# Altium PCB ECTU_PCB.PcbDoc (part 2 of 3)
Units mm, origin at the board's own origin, x right, y up, seen from the top; angles counter-clockwise.
Board outline 155 x 102 mm, 4 copper layers (Top Layer, Mid Top, Mid Bottom, Bottom Layer), stack 0.603 mm thick; 266 components, 187 nets, 917 pads, 241 vias.
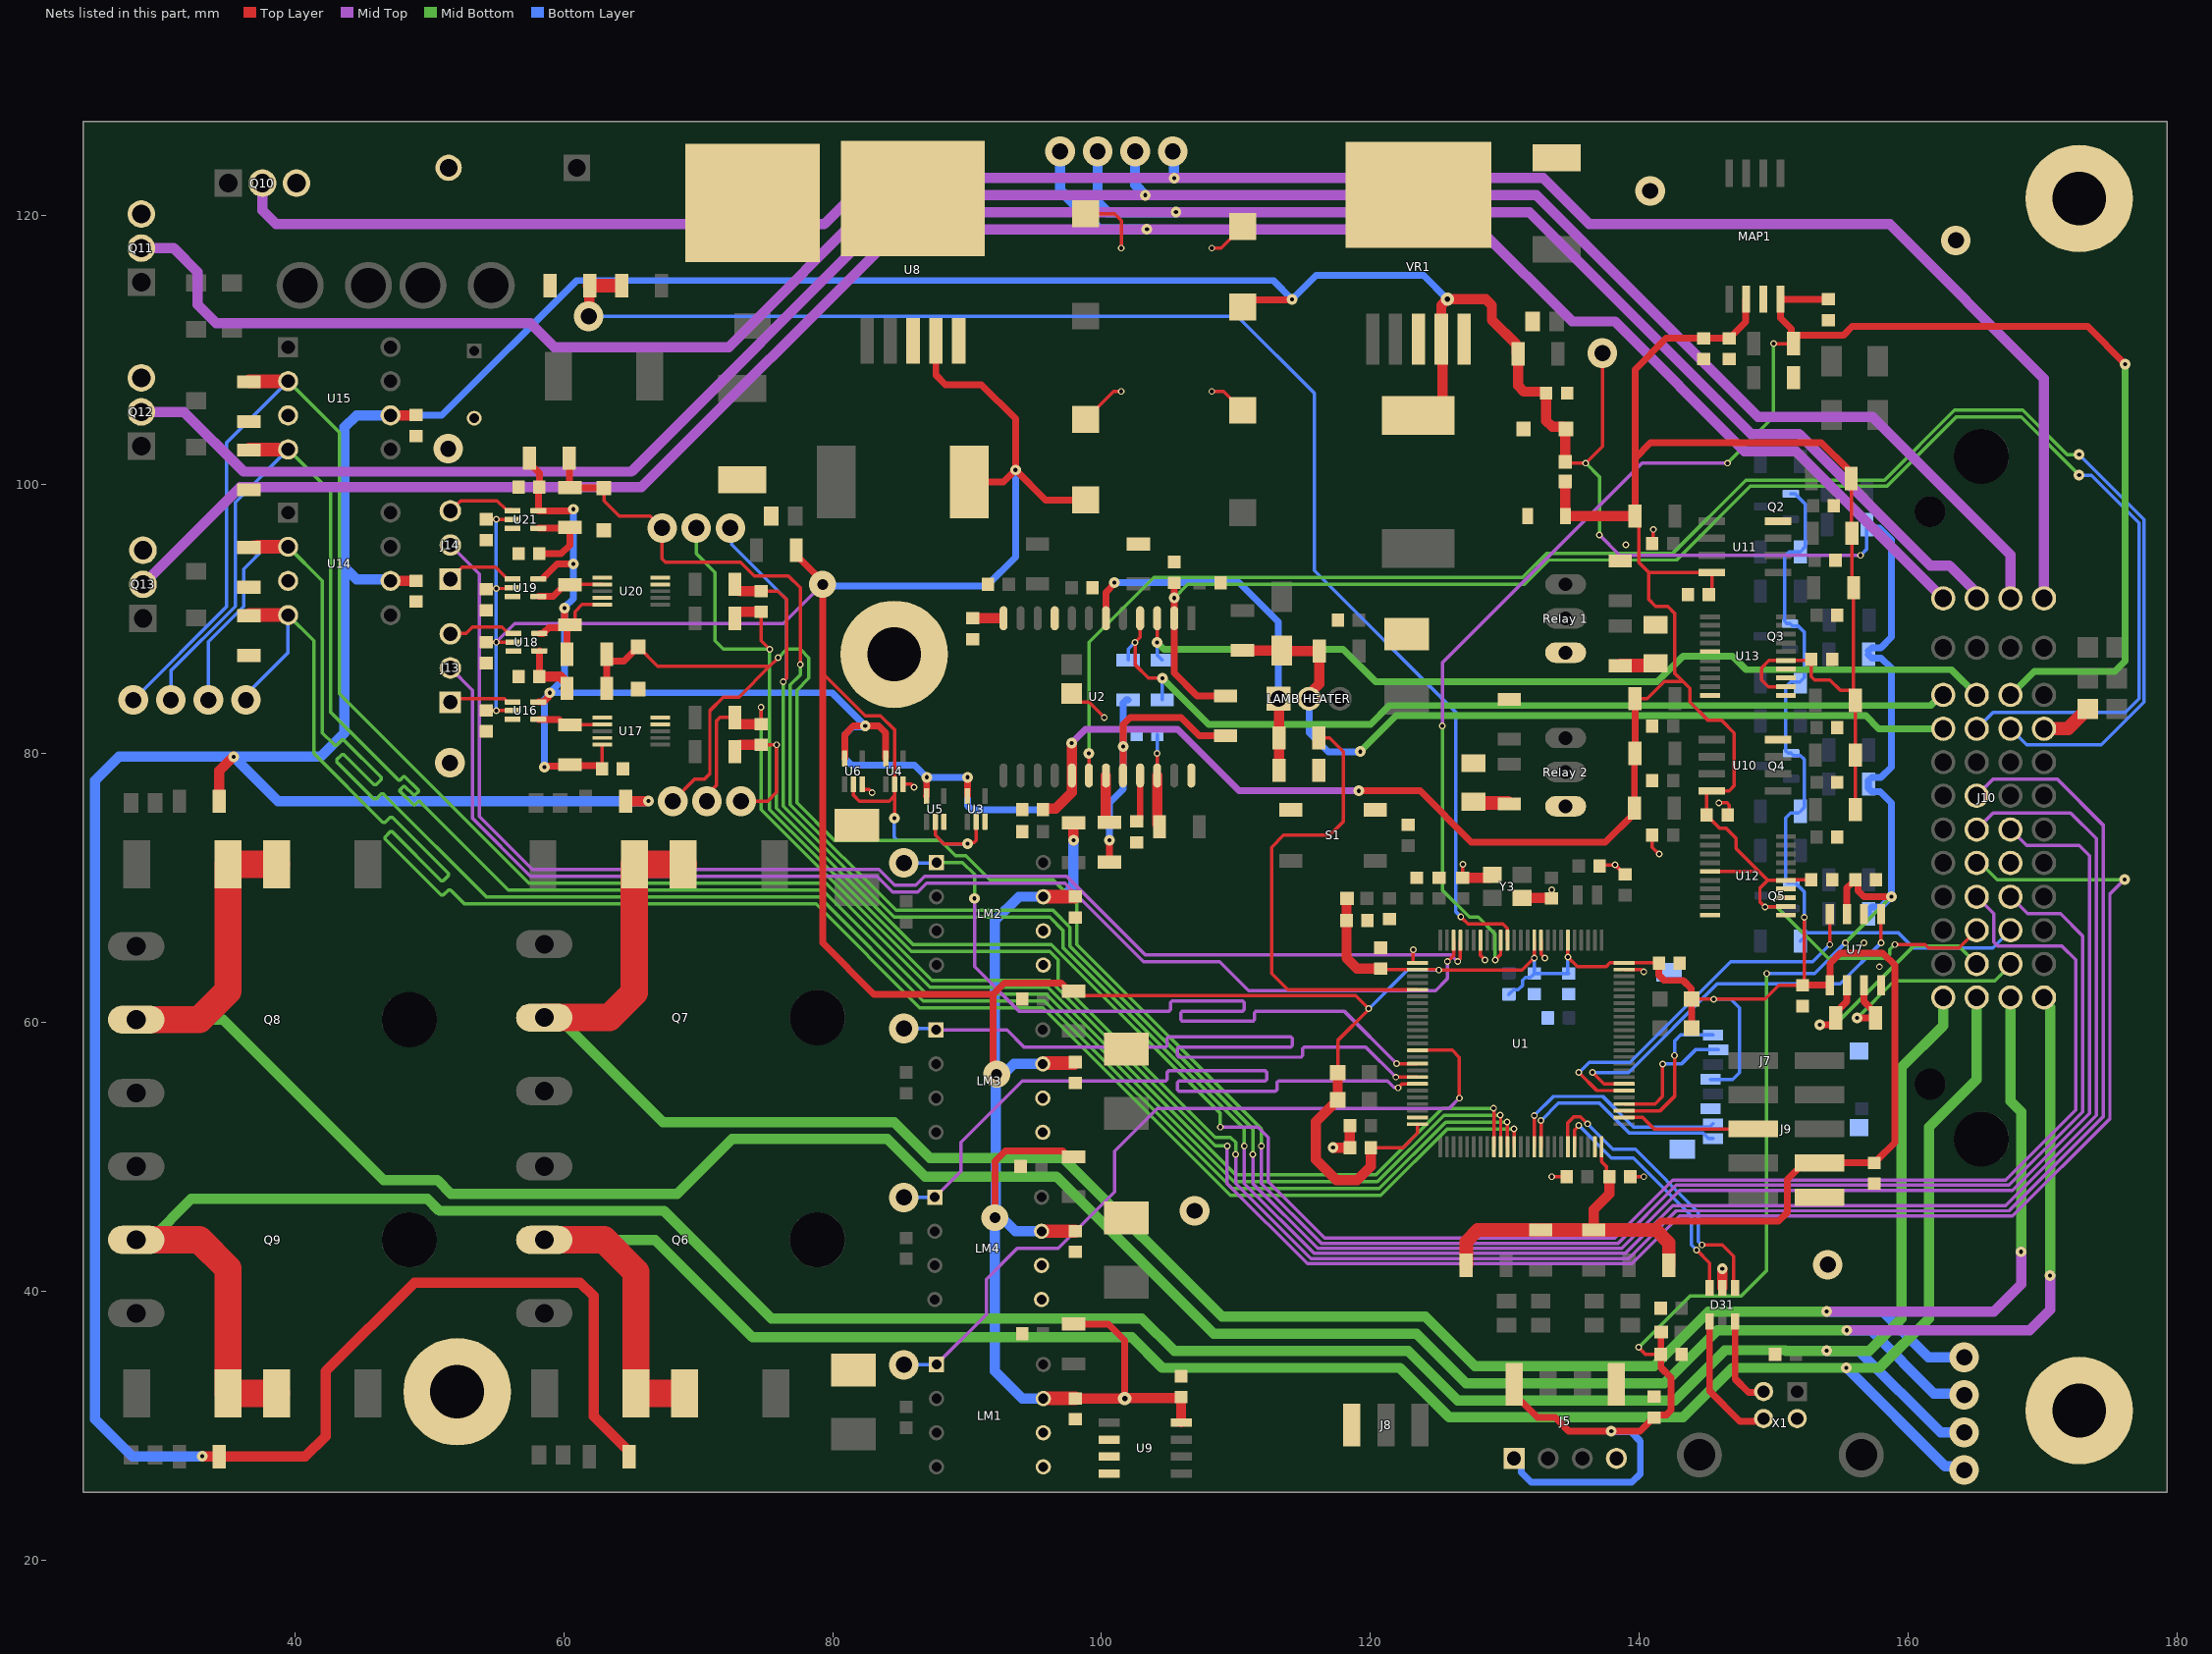
[diagram p4: the nets of this part, all layers, seen from the top]

## Via types
v1: diameter 0.5, hole 0.3, Top Layer to Bottom Layer, 142 vias
v2: diameter 0.8, hole 0.3, Top Layer to Bottom Layer, 59 vias
v3: diameter 2.2, hole 1.2, Top Layer to Bottom Layer, 31 vias
v4: diameter 2, hole 0.8, Top Layer to Bottom Layer, 6 vias
v5: diameter 1, hole 0.4, Top Layer to Bottom Layer, 3 vias

## Nets (pads, with @x,y where several pads share a name; then routed paths per layer and width w, separated by ;. In a path a pad name is that pad's centre, name@x,y a point inside that pad or via, vN(x,y) a via of type N, cw(c..) or ccw(c..) an arc to the next point about the centre after c; other vN are vias at no path point)
3.3V: C3.1 C4.1 C5.1 C6.1 C7.1 C8.1 C9.1 C33.1 C36.2 C37.2 C38.2 C40.2 C41.1 C58.2 C59.2 C64.2 C70.2 C81.2 C82.2 FL.1 J7.4 J9.03 J10.C3 L2.2 LM1.7 LM2.7 LM3.7 LM4.7 Q2.1 Q3.1 Q4.1 Q5.1 R10.1 R14.1 R16.2 R17.1 R18.2 R19.1 R20.1 R21.1 R22.1 R23.1 R27.2 R31.2 R35.2 R39.2 R56.1 R57.1 R62.1 R63.1 U1.6 U1.11 U1.27 U1.50 U1.75 U1.100 U3.2 U4.2 U5.2 U6.2 U7.5 U8.4 U9.8 U16.2 U18.2 U19.2 U21.2 | length 523.6
  Top Layer w0.254: C81.2@54.229,83.198 54.242,83.185 v1(54.969,83.185) U16.2@56.19,83.185 ; C37.2@54.229,88.278 54.231,88.28 v1(54.969,88.28) U18.2@56.261,88.28 ; C36.2@54.235,97.415 v1(54.969,97.415) U21.2@56.183,97.415 ; C70.2@54.289,92.275 v1(54.969,92.275) U19.2@56.136,92.275 ; 79.248,85.979 82.423,82.804 83.566,82.804 84.597,81.773 U4.2@84.597,77.709 84.597,76.85 ; U6.2@81.549,77.709 81.534,77.694 81.534,76.9 81.98,76.454 84.201,76.454 84.597,76.85 ; v2(84.582,75.184) 84.597,75.199 84.597,76.85 ; U5.2@87.63,74.915 87.63,73.914 88.265,73.279 v2(90.043,73.279) 90.147,73.383 90.523,73.383 90.678,73.538 U3.2@90.678,74.915 ; R57.1@97.917,62.313 98.254,61.976 118.908,61.976 v1(119.878,61.006) ; v5@101.72,32.011 v5(101.727,32.004) ; R19.1@117.57,56.261 117.57,58.642 v1@119.888,60.96 ; C7.1@120.028,50.673 122.428,50.673 123.511,51.756 U1.50@123.511,52.42 ; C5.1@120.828,63.92 U1.27@123.487,63.92 ; U1.27@123.511,63.92 125.044,63.92 125.083,63.881 v1(125.095,63.881) 131.286,63.881 v1(132.191,64.786) U1.11@132.191,66.1 ; U1.6@134.691,66.1 v1(134.691,64.841) 135.397,64.135 137.541,64.135 137.826,64.42 U1.100@138.871,64.42 141.434,64.42 C4.1@141.465,64.389 ; U1.75@137.191,50.74 137.191,49.626 137.576,49.241 137.576,48.72 C3.1@137.782,48.514 ; R16.2@143.846,61.767 R16.2@143.891,61.722 v1(145.542,61.722) 149.352,61.722 150.381,62.751 C38.2@152.146,62.751 152.15,62.755 152.273,62.878 v1(152.273,67.818)
  Top Layer w0.508: C70.2@54.229,92.215 C70.2@54.289,92.275 ; C36.2@54.229,97.422 C36.2@54.235,97.415 ; R14.1@77.299,95.123 77.299,94.743 79.248,92.794 79.248,85.979 79.248,65.913 83.07,62.091 91.948,62.091 ; U8.4@87.679,110.685 87.679,108.155 88.392,107.442 91.059,107.442 93.599,104.902 v2(93.599,101.092) ; L2.2@90.167,100.203 92.71,100.203 v2(93.599,101.092) ; v4(92.075,45.466) 92.075,49.657 92.837,50.419 97.112,50.419 97.537,49.994 R56.1@97.917,49.994 ; v4(92.202,56.134) 91.948,56.388 91.948,62.091 ; LM4.7@95.537,44.45 LM4.7@95.544,44.457 ; LM3.7@95.631,56.896 LM3.7@95.701,56.966 ; LM1.7@95.664,32.004 LM1.7@95.671,32.011 ; LM2.7@95.664,69.342 LM2.7@95.671,69.348 ; R63.1@97.917,37.548 100.501,37.548 101.727,36.322 v5(101.727,32.004) ; R57.1@97.917,62.313 97.537,62.313 97.306,62.544 97.306,62.622 97.008,62.92 92.777,62.92 91.948,62.091 ; C59.2@97.974,56.966 C59.2@98.044,57.036 ; C64.2@98.038,32.011 C64.2@98.044,32.017 ; C58.2@98.037,44.457 C58.2@98.044,44.463 ; C82.2@98.038,69.348 C82.2@98.044,69.355 ; C33.1@98.806,98.854 95.837,98.854 v2(93.599,101.092) ; U9.8@105.918,30.239 U9.8@105.931,30.226 ; 140.937,44.544 141.588,45.195 150.351,45.195 151.003,45.847 151.003,48.322 152.211,49.53 J9.03@153.416,49.53 153.423,49.537 157.48,49.537 157.504,49.537 157.716,49.749 157.716,49.773 159.004,51.06 159.004,64.262 158.115,65.151 154.94,65.151 154.178,64.389 U7.5@154.178,62.755 C38.2@152.15,62.755 ; C4.1@141.465,64.389 141.465,63.513 141.859,63.119 143.256,63.119 143.846,62.529 R16.2@143.846,61.767 ; R17.1@143.891,59.563 R16.2@143.891,61.722
  Top Layer w0.762: v2(97.917,73.533) R62.1@97.917,74.842 ; C64.2@98.044,32.017 98.05,32.011 v5@101.72,32.011 ; v5(101.727,32.004) 101.773,32.05 105.85,32.05 C40.2@105.918,32.118 U9.8@105.918,30.239 ; R19.1@117.57,56.261 R18.2@117.57,54.229 115.951,52.61 115.951,49.784 117.475,48.26 118.999,48.26 120.028,49.289 C7.1@120.028,50.673 ; FL.1@118.224,69.175 C41.1@118.224,67.564 118.224,64.783 119.012,63.995 C5.1@120.777,63.995 ; C5.1@120.777,63.971 C5.1@120.828,63.92 ; R22.1@136.606,44.544 136.606,46.055 137.782,47.231 C3.1@137.782,48.514
  Top Layer w1.016: LM4.7@95.544,44.457 C58.2@98.037,44.457 ; LM1.7@95.671,32.011 C64.2@98.038,32.011 ; LM2.7@95.671,69.348 C82.2@98.038,69.348 ; LM3.7@95.701,56.966 C59.2@97.974,56.966 ; R20.1@127.125,41.921 127.125,43.686 127.983,44.544 R21.1@132.669,44.544 R22.1@136.606,44.544 140.937,44.544 141.257,44.544 142.196,43.605 R23.1@142.196,41.921
  Mid Top w0.254: v1(54.969,88.28) 56.351,89.662 76.327,89.662 v4(79.248,92.583)
  Bottom Layer w0.254: v1(54.969,83.185) v1(54.969,88.28) v1(54.969,92.275) v1(54.969,97.415) ; v2(84.582,75.184) 84.582,73.787 84.836,73.533 88.011,73.533 88.265,73.279 v2(90.043,73.279) ; v1(119.878,61.006) 122.754,63.881 v1(125.095,63.881) ; R10.1@130.302,62.075 130.645,62.418 130.998,62.418 131.318,62.738 131.318,63.119 131.533,63.334 131.901,63.334 C8.1@132.207,63.64 ; v1(132.191,64.786) 132.191,63.656 C8.1@132.207,63.64 ; v1(134.691,64.841) 134.691,63.696 C9.1@134.747,63.64 C8.1@132.207,63.64 ; J7.4@145.288,55.753 146.939,55.753 147.447,56.261 147.447,61.087 146.812,61.722 v1(145.542,61.722) ; Q2.1@151.265,99.322 151.58,99.322 152.333,98.569 152.333,95.354 R27.2@151.975,94.996 151.13,94.996 150.805,94.671 150.805,89.843 150.978,89.67 Q3.1@151.218,89.67 151.391,89.497 151.803,89.497 152.273,89.027 152.273,85.642 R31.2@151.975,85.344 151.95,85.319 151.258,85.319 150.888,84.95 150.888,80.191 151.061,80.018 Q4.1@151.301,80.018 151.474,79.845 151.996,79.845 152.275,79.565 152.275,75.992 R35.2@151.975,75.692 151.849,75.566 151.258,75.566 150.901,75.209 150.901,70.539 151.074,70.366 Q5.1@151.301,70.366 151.616,70.366 152.273,69.709 v1(152.273,67.818) R39.2@152.273,66.615 ; R39.2@151.975,66.04 152.273,66.338 R39.2@152.273,66.615 ; J10.C3@167.615,66.853 166.294,65.532 160.401,65.532 159.258,66.675 152.333,66.675 R39.2@152.273,66.615
  Bottom Layer w0.508: v4(79.248,92.583) 79.375,92.456 91.44,92.456 93.599,94.615 v2(93.599,101.092)
  Bottom Layer w0.762: LM4.7@95.537,44.45 93.599,44.45 92.82,45.229 92.312,45.229 v4(92.075,45.466) ; LM3.7@95.631,56.896 93.472,56.896 92.947,56.371 92.439,56.371 v4(92.202,56.134) ; LM1.7@95.664,32.004 94.107,32.004 92.075,34.036 v4(92.075,45.466) ; v2(97.917,73.533) 97.917,70.104 97.155,69.342 LM2.7@95.664,69.342 93.853,69.342 92.075,67.564 92.075,56.261 v4(92.202,56.134) ; v4(92.075,45.466) 92.138,45.529 92.138,56.07 v4(92.202,56.134)
5V: 5V.2 C21.2 C28.1 C29.2 C31.1 C39.2 C65.2 C66.2 D1.C FL1.1 FL2.2 J5.01 J5.02 L1.2 R15.1 R54.1 R55.1 R60.1 R61.1 U7.3 U14.6 U15.6 VR1.4 | length 480.2
  Top Layer w0.254: FL1.1@134.493,101.7 134.593,101.6 v1(136.017,101.6) 137.257,102.84 v3(137.257,109.788) ; v1(139.954,35.814) 140.462,35.306 C31.1@141.592,35.306
  Top Layer w0.508: U14.6@47.117,92.837 U14.6@47.123,92.843 ; U15.6@47.117,105.156 U15.6@47.124,105.163 ; C65.2@49.015,92.843 C65.2@49.022,92.85 ; C66.2@49.015,105.163 C66.2@49.022,105.169 ; C28.1@110.49,113.205 111.021,113.736 114.117,113.736 v2(114.173,113.792) ; J5.02@130.683,33.07 130.683,32.117 131.064,31.736 131.292,31.736 132.421,30.607 133.731,30.607 134.747,29.591 v2(137.922,29.591) 140.064,29.591 141.273,30.8 142.03,30.8 142.367,31.137 142.367,33.555 141.612,34.31 141.612,36.937 FL2.2@141.632,36.957 ; U7.3@155.448,68.055 155.448,69.99 C39.2@155.834,70.376 ; C39.2@156.07,70.612 156.276,70.406 156.276,69.784 156.718,69.342 v2(158.75,69.342)
  Top Layer w0.762: v2@33.147,27.686 R61.1@34.373,27.686 40.767,27.686 42.291,29.21 42.291,34.036 48.895,40.64 61.214,40.64 62.23,39.624 62.23,30.689 64.853,28.066 R54.1@64.853,27.686 ; R60.1@34.373,76.454 34.373,78.696 v2(35.433,79.756) ; U14.6@47.123,92.843 C65.2@49.015,92.843 ; U15.6@47.124,105.163 C66.2@49.015,105.163 ; R55.1@64.594,76.454 v2(66.294,76.454) ; L1.2@123.571,105.153 124.026,105.153 125.349,106.476 125.349,110.743 VR1.4@125.271,110.821 125.271,113.333 v5(125.73,113.792) 128.586,113.792 129.032,113.346 129.032,112.268 130.877,110.423 130.877,109.832 R15.1@130.981,109.728 ; R15.1@130.982,110.107 130.982,107.362 131.428,106.916 133.004,106.916 133.083,106.837 133.083,104.749 133.529,104.303 134.385,104.303 134.544,104.144 D1.C@134.544,104.14 ; FL1.1@134.493,101.7 D1.C@134.493,104.196
  Mid Top w0.254: v1(137.033,96.266) 138.557,94.742 v1(156.464,94.742)
  Mid Bottom w0.254: v1(136.017,101.6) 137.033,100.584 v1(137.033,96.266) ; v1(139.954,35.814) 143.764,39.624 147.574,39.624 149.479,41.529 v1(149.479,63.627) ; v1(155.321,65.913) v2(158.75,69.342)
  Bottom Layer w0.254: v1(149.479,63.627) 153.035,63.627 v1(155.321,65.913) ; v1(156.464,94.742) 156.928,95.206 5V.2@156.928,97.028
  Bottom Layer w0.508: U15.6@47.117,105.156 50.927,105.156 60.96,115.189 112.776,115.189 v2(114.173,113.792) 115.951,115.57 123.952,115.57 v5(125.73,113.792) ; J5.01@130.683,27.559 131.209,27.033 131.209,26.525 131.953,25.781 139.446,25.781 140.081,26.416 140.081,28.829 139.375,29.535 137.978,29.535 v2(137.922,29.591) ; 5V.2@157.055,68.072 157.055,68.334 157.286,68.565 157.973,68.565 v2(158.75,69.342) 158.75,76.327 157.91,77.167 157.286,77.167 157.055,77.398 157.055,77.986 157.286,78.217 157.973,78.217 158.75,78.994 158.75,86.36 158.004,87.106 157.286,87.106 157.055,87.337 5V.2@157.055,87.376 ; 5V.2@157.055,87.638 157.286,87.869 157.973,87.869 158.75,88.646 158.75,95.885 157.877,96.758 5V.2@157.159,96.758
  Bottom Layer w0.762: v2(33.095,27.704) 27.922,27.704 25.146,30.48 25.146,77.978 26.924,79.756 v2(35.433,79.756) ; U14.6@47.117,92.837 47.003,92.951 44.59,92.951 43.688,93.853 ; U15.6@47.117,105.156 44.577,105.156 43.688,104.267 43.688,93.853 ; v2(66.294,76.454) 38.735,76.454 v2(35.433,79.756) ; v2(35.433,79.756) 41.91,79.756 43.688,81.534 43.688,93.853
5V_Sensor: C1.2 C24.2 C25.2 C42.2 C47.2 C68.2 C72.2 C83.2 C84.2 FL1.2 J2.1 J10.C2 MAP1.2 R40.1 R41.1 R42.1 R43.1 R46.1 R47.1 R48.1 R51.1 R52.1 R53.1 R74.2 R78.1 R79.2 R83.1 U2.17 U3.5 U4.5 U5.5 U6.5 U10.8 U11.8 U12.2 U12.5 U12.15 U13.2 U13.5 U16.5 U17.10 U18.5 U19.5 U20.10 U21.5 | length 329.3
  Top Layer w0.254: v2@58.856,84.186 58.856,84.411 v2(58.96,84.515) ; R79.2@60.833,89.81 60.833,90.551 61.357,91.075 U20.10@62.874,91.075 ; C68.2@62.852,78.867 62.852,78.897 62.852,80.648 U17.10@62.865,80.661 ; FL1.2@134.493,100.23 FL1.2@134.499,100.224 ; R47.1@139.642,75.566 R47.1@139.642,75.946 ; R48.1@139.642,79.966 R48.1@139.686,80.01 ; R46.1@139.686,84.074 140.589,84.074 141.859,85.344 143.256,85.344 ; R43.1@139.686,97.663 139.954,97.395 139.954,94.234 140.716,93.472 ; U12.15@145.263,71.222 148.895,71.222 ; C83.2@145.427,91.821 145.427,93.434 U11.8@145.39,93.472 140.716,93.472 ; U12.2@150.901,68.605 149.39,68.605 149.364,68.58 v1(149.352,68.58) 148.971,68.961 148.971,69.977 149.555,70.561 ; U12.5@150.901,70.561 149.555,70.561 ; U13.2@150.901,84.963 149.606,84.963 149.098,85.471 149.098,86.36 149.657,86.919 U13.5@150.901,86.919 152.717,86.919 C84.2@152.793,86.995 152.793,85.713 153.035,85.471 154.175,85.471 154.961,84.685 155.706,84.685 R40.1@155.937,84.454 ; U12.5@150.927,70.587 C47.2@152.768,70.587 ; R52.1@155.766,100.457 155.766,96.437 R53.1@155.81,96.393 155.81,92.456 R51.1@155.937,92.329 R40.1@155.937,84.454 ; R41.1@156.064,75.819 R42.1@156.064,79.883 R40.1@156.064,83.947 156.064,84.327 R40.1@155.937,84.454 ; v1(159.004,65.786) 161.271,65.786 161.525,65.532 163.779,65.532 J10.C2@165.1,66.853 ; 140.716,93.472 140.716,91.44 141.224,90.932 142.113,90.932 142.621,90.424 142.621,85.979 143.256,85.344 ; 143.256,85.344 143.764,84.836 143.764,83.82 145.097,82.486 146.113,82.486 147.066,81.534 147.066,77.597 146.685,77.216 U10.8@145.39,77.216 145.173,77.216 145.021,77.064 C42.2@145.021,75.438 145.021,75.408 146.007,74.422 146.456,74.422 147.193,73.685 147.193,72.923 148.895,71.222 ; 148.895,71.222 149.555,70.561
  Top Layer w0.508: R83.1@57.448,101.981 57.448,101.601 58.179,100.87 C72.2@58.179,99.822 58.11,99.753 U21.5@58.11,98.059 60.515,98.059 60.627,98.171 v2(60.706,98.171) ; U16.5@58.11,83.835 58.505,83.835 58.856,84.186 v2@58.802,84.24 ; U18.5@58.181,88.93 58.468,88.93 58.576,89.038 58.576,89.071 58.874,89.369 R79.2@60.071,89.369 ; U19.5@58.451,93.033 59.525,94.107 v2(60.706,94.107) ; v2(58.547,78.994) 58.603,79.05 60.337,79.05 R74.2@60.452,79.165 60.514,79.103 62.646,79.103 C68.2@62.852,78.897 ; v2(60.071,90.805) R79.2@60.071,89.369 ; R78.1@60.242,87.376 R79.2@60.242,89.369 ; R79.2@60.833,89.81 60.602,89.579 R79.2@60.452,89.579 R79.2@60.242,89.369 ; U6.5@80.899,79.629 80.899,81.407 81.534,82.042 v2(82.423,82.042) 83.439,82.042 83.947,81.534 U4.5@83.947,79.629 ; U5.5@86.98,76.835 86.988,76.842 86.988,78.225 v2(86.995,78.232) ; U3.5@90.028,76.835 90.036,76.842 90.036,78.225 v2(90.043,78.232) ; v2(119.126,77.216) 123.698,77.216 127.508,73.406 137.482,73.406 R47.1@139.642,75.566 ; R47.1@139.642,75.946 R48.1@139.642,79.966 ; R48.1@139.686,80.01 R46.1@139.686,84.074 ; R43.1@139.686,98.274 139.686,101.967 ; MAP1.2@147.955,113.811 147.924,113.78 147.924,112.093 146.715,110.884 C25.2@146.685,110.884 C24.2@144.78,110.884 141.999,110.884 139.686,108.571 139.686,101.967 ; C47.2@152.768,70.587 C47.2@152.793,70.612 ; R52.1@155.766,100.457 155.535,100.688 155.535,101.132 153.543,103.124 140.843,103.124 139.686,101.967 ; R79.2@60.071,89.369 R79.2@60.242,89.369
  Top Layer w0.762: C1.2@95.644,75.819 95.644,75.823 95.723,75.902 96.603,75.902 97.79,77.089 U2.17@97.79,78.359 v2(97.79,80.772) ; FL1.2@134.499,100.224 J2.1@134.499,97.663 R43.1@139.686,97.663
  Mid Top w0.508: v2(97.79,80.772) 98.806,81.788 105.664,81.788 110.236,77.216 v2(119.126,77.216)
  Mid Bottom w0.254: v1(149.352,68.58) 150.241,68.58 154.051,64.77 158.369,64.77 158.636,65.037 158.636,65.406 159.004,65.774 v1(159.004,65.786)
  Bottom Layer w0.508: v2@58.626,78.994 v2(58.547,78.994) 58.547,84.023 58.96,84.436 v2(58.96,84.515) ; v2(60.706,98.171) v2(60.706,94.107) 60.706,91.519 60.071,90.884 v2(60.071,90.805) 60.071,85.626 v2(58.96,84.515) ; v2(97.79,80.772) 97.79,77.089 96.52,75.819 90.341,75.819 90.043,76.117 v2(90.043,78.232) v2(86.995,78.232) 86.106,79.121 81.407,79.121 80.899,79.629 80.899,81.407 81.478,81.986 82.367,81.986 v2(82.423,82.042) 79.95,84.515 v2(58.96,84.515)
Bat_Voltage: R12.2 R13.1 U1.15 | length 109.1
  Top Layer w0.254: v1@126.752,67.812 127.254,67.31 129.856,67.31 130.175,66.991 U1.15@130.175,66.116
  Top Layer w0.762: v3(61.849,112.522) 61.891,112.564 61.891,114.766 R13.1@61.932,114.808
  Top Layer w1.016: R13.1@61.932,114.808 R12.2@64.306,114.808
  Bottom Layer w0.254: v3(61.849,112.522) 110.109,112.522 115.824,106.807 115.824,93.599 126.365,83.058 126.365,68.212 v1(126.72,67.857)
CANH: J10.B3 RCAN1.2 U7.7 | length 17.3
  Top Layer w0.508: v2(156.21,60.325) RCAN1.2@157.563,60.325 157.563,60.705 156.718,61.55 U7.7@156.718,62.755
  Mid Bottom w0.254: v2(156.21,60.325) 158.953,63.068 166.446,63.068 167.615,64.237 J10.B3@167.615,64.338
CANL: J10.B2 RCAN1.1 U7.6 | length 19
  Top Layer w0.508: v2(153.416,59.817) 154.372,59.817 154.603,60.048 RCAN1.1@154.603,60.325 ; RCAN1.1@154.476,60.325 154.476,60.578 155.448,61.55 U7.6@155.448,62.755
  Mid Bottom w0.254: v2(153.416,59.817) 154.559,59.817 160.401,65.659 163.779,65.659 J10.B2@165.1,64.338
CANRX: U1.81 U7.4 | length 28.8
  Top Layer w0.254: v1(135.509,56.261) 136.85,54.92 U1.81@138.871,54.92 ; v1(154.178,65.786) U7.4@154.178,68.055
  Bottom Layer w0.254: v1(135.509,56.261) 136.271,57.023 139.319,57.023 146.812,64.516 152.908,64.516 v1(154.178,65.786)
CANTX: U1.82 U7.1 | length 30.3
  Top Layer w0.254: v1(136.525,56.261) 137.366,55.42 U1.82@138.871,55.42 ; v1(157.988,65.913) U7.1@157.988,68.055
  Bottom Layer w0.254: v1(136.525,56.261) 139.192,56.261 145.796,62.865 154.94,62.865 v1(157.988,65.913)
CJ125_DIAHD: "LAMB HEATER.2" D30.2 J10.J1 R4.1 R88.2 | length 61.4
  Top Layer w0.762: R4.1@110.49,87.674 110.502,87.662 D30.2@113.411,87.662 113.443,87.63 R88.2@116.205,87.63 116.205,85.177 115.443,84.415 115.443,84.074
  Mid Bottom w0.508: v2(119.253,80.137) 121.92,82.804 156.845,82.804 157.81,81.839 J10.J1@162.611,81.839
  Bottom Layer w0.508: 115.443,84.074 115.443,81.534 116.859,80.118 119.234,80.118 v2(119.253,80.137)
CJ125_DIAHG: "LAMB HEATER.1" R6.1 R7.2 U2.6 | length 27.4
  Top Layer w0.508: U2.6@100.33,90.059 100.33,91.996 100.965,92.631 v2(100.965,92.71)
  Top Layer w0.762: 113.163,84.074 113.201,84.036 R7.2@113.201,81.153 R6.1@113.201,78.74
  Bottom Layer w0.508: v2(100.965,92.71) 110.236,92.71 113.163,89.783 113.163,84.074
CJ125_IA: J10.K1 R8.1 R85.1 U2.4 | length 69.6
  Top Layer w0.254: U2.4@102.87,90.059 102.87,88.646 v1(102.489,88.265) 102.489,86.614 103.505,85.598 v2(104.521,85.598)
  Mid Bottom w0.508: v2(104.521,85.598) 107.95,82.169 120.015,82.169 121.412,83.566 161.666,83.566 162.453,84.353 J10.K1@162.611,84.353
  Bottom Layer w0.254: R85.1@101.981,86.951 101.981,87.757 v1(102.489,88.265) ; R8.1@104.521,83.991 v2(104.521,85.598)
CJ125_IP: J10.K2 R8.2 U2.3 | length 67.4
  Top Layer w0.254: v2(104.14,88.265) U2.3@104.14,90.059
  Mid Bottom w0.508: v2(104.14,88.265) 104.648,87.757 117.983,87.757 120.396,85.344 141.351,85.344 143.256,87.249 146.939,87.249 147.955,86.233 163.22,86.233 J10.K2@165.1,84.353
  Bottom Layer w0.254: v2(104.14,88.265) 104.14,87.309 104.498,86.951 R8.2@104.521,86.951
CJ125_RS: U2.9
CJ125_UA: C80.1 U2.21 | length 3.5
  Top Layer w0.508: C80.1@102.616,74.943 102.646,74.943 102.87,75.167 U2.21@102.87,78.359
CJ125_UN: C11.1 J10.J2 R87.2 U2.2 | length 117.9
  Top Layer w0.508: C11.1@105.41,92.697 v2(105.41,91.567) U2.2@105.41,90.059 105.41,85.979 107.105,84.284 R87.2@109.22,84.284
  Mid Bottom w0.254: v2(105.41,91.567) 106.426,92.583 131.445,92.583 133.255,94.393 142.78,94.393 148.272,99.885 158.432,99.885 163.576,105.029 168.402,105.029 v2(172.72,100.711)
  Bottom Layer w0.254: J10.J2@165.1,81.839 166.319,83.058 176.149,83.058 177.165,84.074 177.165,97.155 173.628,100.692 172.739,100.692 v2(172.72,100.711)
CJ125_UP: R85.2 R86.1 R87.1 U2.20 | length 24.9
  Top Layer w0.508: R86.1@100.584,71.926 v2(100.584,73.533) ; U2.20@101.6,78.359 v2(101.6,80.518) 101.6,82.169 102.108,82.677 105.918,82.677 107.271,81.324 R87.1@109.22,81.324
  Bottom Layer w0.508: v2(100.584,73.533) 100.584,76.327 101.6,77.343 v2(101.6,80.518) 101.6,83.76 101.831,83.991 R85.2@101.981,83.991
CJ125_UR: C77.1 U2.12 | length 2.2
  Top Layer w0.762: C77.1@90.424,90.056 U2.12@92.629,90.056
CJ125_US: R86.2 U2.19 | length 3.8
  Top Layer w0.254: R86.2@100.33,75.244 100.203,75.244 100.561,74.886 R86.2@100.584,74.886
  Top Layer w0.762: R86.2@100.33,75.244 U2.19@100.33,78.359
CJ125_VM: J10.J3 U2.18 | length 124.2
  Top Layer w0.254: U2.18@99.06,78.359 v2(99.06,80.01)
  Mid Bottom w0.254: v2(99.06,80.01) 99.06,88.265 103.886,93.091 131.318,93.091 133.096,94.869 142.467,94.869 147.928,100.33 158.242,100.33 163.449,105.537 168.529,105.537 171.831,102.235 v2(172.72,102.235)
  Bottom Layer w0.254: J10.J3@167.615,81.839 168.808,80.645 174.371,80.645 177.546,83.82 177.546,97.409 v2(172.72,102.235)
CKP_HALL_5V_OUT: C73.2 R82.1 U21.4 | length 6.2
  Top Layer w0.508: U21.4@58.11,96.759 60.393,96.759 R82.1@60.452,96.818 60.452,95.504 59.817,94.869 C73.2@58.179,94.869
CKP_HALL_IN: D29.C J10.F3 R82.2 R83.2 | length 184.3
  Top Layer w0.254: D29.C@62.992,99.746 62.992,98.806 64.135,97.663 66.421,97.663 v3(67.31,96.774) 67.31,94.488 67.564,94.234 73.152,94.234 74.168,93.218 76.708,93.218 77.597,92.329 v1(77.597,86.614)
  Top Layer w0.508: R83.2@60.408,101.981 60.408,99.822 R82.2@60.452,99.778 60.484,99.746 D29.C@62.992,99.746
  Mid Top w0.254: v1(111.252,50.165) 111.252,48.006 116.078,43.18 138.684,43.18 143.002,47.498 167.767,47.498 173.482,53.213 173.482,72.39 172.72,73.152 168.808,73.152 J10.F3@167.615,74.346
  Mid Bottom w0.254: v1(77.597,86.614) 77.597,85.852 76.835,85.09 76.835,76.203 84.712,68.326 96.393,68.326 97.663,67.056 97.663,65.659 111.252,52.07 v1(111.252,50.165)
CKP_HALL_OUT: J14.3 U21.1 | length 5.3
  Top Layer w0.254: J14.3@51.562,98.044 52.324,98.806 55.048,98.806 55.722,98.132 56.117,98.132 U21.1@56.19,98.059
CKP_IN_1: C71.2 J10.G2 R80.1 | length 183.8
  Top Layer w0.254: C71.2@74.676,90.538 74.676,88.392 v1(75.311,87.757)
  Top Layer w0.762: R80.1@72.727,90.043 72.727,90.423 72.831,90.527 73.266,90.527 73.277,90.538 C71.2@74.676,90.538
  Mid Top w0.254: v1(109.982,50.165) 109.982,48.006 115.57,42.418 139.192,42.418 142.748,45.974 167.513,45.974 170.18,48.641 174.498,52.959 174.498,74.676 171.069,78.105 166.345,78.105 J10.G2@165.1,76.86
  Mid Bottom w0.254: v3(69.85,96.774) 69.85,94.869 71.247,93.472 71.247,88.392 71.882,87.757 v1(75.311,87.757) 75.311,75.819 85.852,65.278 96.139,65.278 96.774,64.643 96.774,63.119 108.458,51.435 109.601,51.435 109.982,51.054 v1(109.982,50.165)
CKP_IN_2: C71.1 J10.F2 R81.1 | length 182.7
  Top Layer w0.254: R81.1@72.727,92.583 72.727,92.446 R81.1@73.085,92.088 ; C71.1@74.676,92.088 75.933,92.088 76.581,91.44 76.581,85.598 v1(76.327,85.344)
  Top Layer w0.762: R81.1@73.085,92.088 C71.1@74.676,92.088
  Mid Top w0.254: v1(110.617,50.8) 110.617,48.006 115.824,42.799 138.938,42.799 142.494,46.355 167.259,46.355 173.99,53.086 173.99,73.66 172.085,75.565 166.319,75.565 J10.F2@165.1,74.346
  Mid Bottom w0.254: v1(76.327,85.344) 76.327,76.073 84.582,67.818 96.139,67.818 97.155,66.802 97.155,65.532 110.617,52.07 v1(110.617,50.8)
  Bottom Layer w0.254: v3(72.39,96.774) 72.479,96.685 72.479,95.542 76.581,91.44 76.581,85.616 76.327,85.362 v1(76.327,85.344)
CKP_OUT: J14.2 U1.22 | length 100.5
  Top Layer w0.254: v1(126.492,64.516) 126.492,64.528 126.691,64.727 U1.22@126.691,66.1
  Mid Top w0.254: J14.2@51.562,95.504 53.721,93.345 53.721,75.311 57.658,71.374 83.439,71.374 84.608,70.205 86.191,70.205 86.852,70.866 97.409,70.866 103.251,65.024 125.984,65.024 v1(126.492,64.516)
CKP_OUT_5V: R79.1 U19.4 U20.7 | length 5.1
  Top Layer w0.254: R79.1@60.488,92.575 U20.7@62.874,92.575
  Top Layer w0.508: U19.4@58.11,91.679 59.212,91.679 60.072,92.539 R79.1@60.452,92.539 R79.1@60.488,92.575
CKP_VR_OUT: J14.1 U19.1 | length 5.4
  Top Layer w0.254: J14.1@51.562,92.964 52.451,93.853 54.921,93.853 55.795,92.979 U19.1@56.19,92.979
CMP_HALL_5V_OUT: C67.2 R76.1 U18.4 | length 4.6
  Top Layer w0.508: C67.2@58.18,85.726 U18.4@58.181,87.63
  Top Layer w0.762: C67.2@58.18,85.726 C67.2@58.179,85.725 59.733,85.725 60.242,85.216 R76.1@60.242,84.836
CMP_HALL_IN: D28.C J10.D3 R76.2 R78.2 | length 181.9
  Top Layer w0.254: D28.C@65.537,87.935 66.985,86.487 75.311,86.487 ; v3(68.106,76.445) 69.766,78.105 70.485,78.105 70.866,78.486 70.866,83.185 71.882,84.201 73.025,84.201 75.311,86.487 ; v1(75.946,87.122) 75.311,86.487
  Top Layer w0.508: R76.2@63.202,84.836 R78.2@63.202,87.226 ; R78.2@63.202,87.376 R78.2@63.202,87.226 ; D28.C@65.537,87.935 D28.C@65.532,87.935 64.465,86.868 63.56,86.868 R78.2@63.202,87.226
  Mid Top w0.254: v1(111.887,50.8) 111.887,48.006 116.332,43.561 138.43,43.561 142.748,47.879 167.513,47.879 172.974,53.34 172.974,66.421 171.323,68.072 168.885,68.072 J10.D3@167.615,69.342
  Mid Bottom w0.254: v1(75.946,87.122) 76.581,87.757 77.597,87.757 78.232,87.122 78.232,85.598 77.343,84.709 77.343,76.327 80.137,73.533 88.011,73.533 89.154,72.39 89.916,72.39 91.694,70.612 96.393,70.612 98.171,68.834 98.171,65.786 111.887,52.07 v1(111.887,50.8)
CMP_HALL_OUT: J13.3 U18.1 | length 5.1
  Top Layer w0.254: J13.3@51.562,88.9 51.603,88.941 52.746,88.941 53.213,89.408 55.388,89.408 55.866,88.93 U18.1@56.261,88.93
CMP_IN_1: C69.2 J10.D2 R75.1 | length 152.6
  Top Layer w0.254: R75.1@72.727,80.137 72.727,80.274 R75.1@73.085,80.632 ; v3(73.186,76.445) 75.175,76.445 75.819,77.089 v1(75.819,80.645) 74.689,80.645 C69.2@74.676,80.632
  Top Layer w0.762: R75.1@73.085,80.632 C69.2@74.676,80.632
  Mid Top w0.254: v1(108.839,52.197) 111.633,52.197 112.395,51.435 112.395,48.133 116.586,43.942 138.176,43.942 142.494,48.26 167.259,48.26 172.466,53.467 172.466,64.643 171.45,65.659 166.689,65.659 166.37,65.978 166.37,68.072 J10.D2@165.1,69.342
  Mid Bottom w0.254: v1(75.819,80.645) 75.819,75.946 85.979,65.786 96.266,65.786 108.839,53.213 v1(108.839,52.197)
CMP_IN_2: C69.1 J10.E2 R77.1 | length 169.1
  Top Layer w0.254: v3(70.646,76.445) 70.646,76.917 71.374,77.646 71.374,82.423 71.628,82.677 R77.1@72.727,82.677 72.727,82.54 R77.1@73.085,82.182 ; C69.1@74.676,82.182 v1(74.676,83.439)
  Top Layer w0.762: R77.1@73.085,82.182 C69.1@74.676,82.182
  Mid Top w0.254: v1(109.347,50.8) 109.347,48.006 115.316,42.037 139.446,42.037 143.002,45.593 167.767,45.593 175.006,52.832 175.006,69.532 v2(176.102,70.628)
  Mid Bottom w0.254: v1(74.676,83.439) 74.676,75.819 87.376,63.119 96.139,63.119 108.458,50.8 v1(109.347,50.8) ; J10.E2@165.1,71.857 165.382,71.857 166.626,70.612 v2@176.149,70.612
CMP_OUT: J13.2 U1.23 | length 93.7
  Top Layer w0.254: v1(125.73,64.516) 126.191,64.977 U1.23@126.191,66.1
  Mid Top w0.254: J13.2@51.562,86.36 53.213,84.709 53.213,75.184 57.531,70.866 83.312,70.866 84.481,69.697 86.334,69.697 86.995,70.358 97.282,70.358 103.124,64.516 108.781,64.516 110.94,62.357 124.841,62.357 125.73,63.246 v1(125.73,64.516)
CMP_OUT_5V: R74.1 U16.4 U17.7 | length 4.9
  Top Layer w0.254: R74.1@60.47,82.143 U17.7@62.847,82.143
  Top Layer w0.508: U16.4@58.11,82.535 59.662,82.535 60.072,82.125 R74.1@60.452,82.125
  Top Layer w0.762: R74.1@60.452,82.125 R74.1@60.47,82.143
CMP_VR_OUT: J13.1 U16.1 | length 4.8
  Top Layer w0.254: J13.1@51.562,83.82 51.816,84.074 55.573,84.074 55.722,83.925 55.722,83.908 55.795,83.835 U16.1@56.19,83.835
D+: D31.4 X1.3 | length 9.9
  Top Layer w0.508: D31.4@145.227,37.739 145.227,32.573 147.483,30.317 X1.3@149.067,30.317
D+_CH: D31.3 U1.71 | length 18.8
  Top Layer w0.254: U1.71@135.191,50.74 135.191,51.994 135.509,52.312 v1(135.509,52.324) ; v1(144.272,43.053) 145.227,42.098 D31.3@145.227,40.239
  Bottom Layer w0.254: v1(135.509,52.324) 137.922,49.911 139.573,49.911 143.891,45.593 143.891,43.434 v1(144.272,43.053)
D-: D31.6 X1.2 | length 6.7
  Top Layer w0.508: D31.6@147.127,37.739 147.127,33.467 148.137,32.457 148.926,32.457 X1.2@149.067,32.317
D-_CH: D31.1 U1.70 | length 22.2
  Top Layer w0.254: U1.70@134.691,50.74 134.691,52.522 135.128,52.959 135.636,52.959 v1(136.144,52.451) ; v1(144.653,43.434) 146.177,43.434 147.022,42.589 147.022,40.344 D31.1@147.127,40.239
  Bottom Layer w0.254: v1(136.144,52.451) 138.049,50.546 139.7,50.546 144.399,45.847 144.399,43.688 v1(144.653,43.434)
DATA_0: J7.7 U1.65 | length 17.3
  Top Layer w0.254: U1.65@132.191,50.74 v1(132.191,53.07)
  Bottom Layer w0.254: v1(132.191,53.07) 133.604,54.483 137.287,54.483 139.573,52.197 145.232,52.197 J7.7@145.488,52.453
DATA_1: J7.8 U1.66 | length 16.4
  Top Layer w0.254: U1.66@132.691,50.74 v1(132.691,52.681)
  Bottom Layer w0.254: v1(132.691,52.681) 133.985,53.975 137.033,53.975 139.256,51.752 144.739,51.752 145.138,51.353 J7.8@145.488,51.353
DATA_2: J7.1 U1.78 | length 11.4
  Top Layer w0.254: U1.78@138.871,53.42 141.558,53.42 142.621,54.483 v1(142.621,57.531)
  Bottom Layer w0.254: v1(142.621,57.531) 142.621,58.593 143.081,59.053 J7.1@145.488,59.053
DATA_3: J7.2 U1.79 | length 10.1
  Top Layer w0.254: U1.79@138.871,53.92 141.169,53.92 141.732,54.483 v1(141.732,56.896)
  Bottom Layer w0.254: v1(141.732,56.896) 143.129,56.896 144.186,57.953 J7.2@145.888,57.953
GND: "Relay 1.OUT" "Relay 2.OUT" C1.1 C3.2 C4.2 C5.2 C6.2 C7.2 C8.2 C9.2 C11.2 C12.1 C13.1 C15.1 C16.1 C17.2 C18.1 C19.1 C20.1 C21.1 C22.1 C23.1 C24.1 C25.1 C26.2 C27.2 C28.2 C29.1 C30.2 C31.2 C32.1 C33.2 C34.N C35.2 C36.1 C37.1 C38.1 C39.1 C40.1 C41.2 C42.1 C43.1 C44.1 C45.1 C46.1 C47.1 C48.1 C49.1 C50.1 C51.1 C52.1 C53.1 C54.2 C56.2 C58.1 C59.1 C60.2 C63.2 C64.1 C65.1 C66.1 C67.1 C68.1 C70.1 C72.1 C73.1 C74.2 C75.2 C76.2 C77.2 C78.2 C79.2 C80.2 C81.1 C82.1 C83.1 C84.1 D1.A D2.C D3.C D4.A D5.A D6.2 D13.A D15.A D28.A D29.A D31.2 J2.2 J3.2 J5.07 J5.08 J7.6 J7.S1 J7.S2 J7.S3 J7.S4 J8.03 J9.01 J10.E3 LM1.5 LM1.6 LM2.5 LM2.6 LM3.5 LM3.6 LM4.5 LM4.6 MAP1.3 NT5.1 pad.7 Q10.3 Q11.3 Q12.3 Q13.3 R2.1 R3.1 R6.2 R11.1 R13.2 R45.2 R50.2 R58.2 R59.2 R64.1 R65.2 R66.1 R67.1 R72.1 R73.1 R84.2 S1.3 S1.4 U1.10 U1.19 U1.26 U1.49 U1.74 U1.99 U2.24 U3.3 U4.3 U5.3 U6.3 U7.2 U7.8 U8.3 U8.5 U8.6 U9.2 U9.3 U9.4 U10.4 U11.4 U12.1 U12.3 U12.4 U12.20 U13.1 U13.3 U13.4 U13.15 U13.20 U14.3 U15.3 U16.3 U17.4 U17.5 U17.6 U17.9 U18.3 U19.3 U20.4 U20.5 U20.6 U20.9 U21.3 VR1.3 VR1.5 VR1.6 X1.4 Y3.2 Y3.4 | length 44.5
  Top Layer w0.254: U6.3@82.199,77.709 82.199,77.384 82.272,77.311 82.709,77.311 v1@82.922,77.098 ; U4.3@85.247,77.709 85.834,77.708 v1(86.048,77.494) ; NT5.1@97.79,84.455 98.425,83.82 99.06,83.82 v1(100.203,82.677) ; C33.2@98.806,104.854 100.886,106.934 v1(101.473,106.934) ; C35.2@98.806,120.142 100.965,120.142 101.473,119.634 v1(101.473,117.602) ; v1(108.204,106.934) 109.083,106.934 C27.2@110.49,105.527 ; v1(108.204,117.602) 108.887,117.602 C28.2@110.49,119.205 ; v1(123.19,65.405) 123.19,64.433 123.203,64.42 U1.26@123.511,64.42 ; C32.1@126.873,70.752 v1(126.873,71.755) ; U1.19@128.191,66.1 128.191,64.976 v1(128.524,64.643) ; U1.10@132.691,66.1 132.691,65.048 v1(132.969,64.77) ; C20.1@133.425,69.254 C20.1@133.477,69.202 v1(133.477,69.85) ; v1(133.477,48.514) C16.1@134.594,48.514 ; C19.1@137.046,71.628 137.134,71.716 v1(138.198,71.716) 138.908,71.006 C18.1@138.938,71.006 ; U1.99@138.871,63.92 140.157,63.92 140.323,63.754 v1(140.335,63.754) ; C3.2@139.332,48.514 v1(140.335,48.514) ; C49.1@140.969,73.914 140.969,73.026 v1(141.478,72.517) ; C46.1@140.969,95.631 141.039,95.701 v1(141.039,96.671) ; v1(145.923,76.327) 146.536,76.327 146.703,76.16 146.703,75.57 C42.1@146.571,75.438
  Top Layer w0.762: Q13.3@28.702,95.118 Q13.3@28.765,95.182 ; v2(117.221,50.673) C7.2@118.478,50.673 C15.1@118.478,52.294 ; C32.1@126.873,70.752 128.873,70.752 Y3.2@129.075,70.954 ; Y3.4@131.275,69.254 C20.1@133.425,69.254 ; D31.2@146.177,40.239 v2(146.177,41.656)
  other v1: 157.861,64.135 156.718,65.913 82.931,77.089 139.007,95.528
  other v3: 154.021,41.97 106.925,45.973 51.532,79.308 51.405,102.676 163.546,118.17 140.813,121.853
Ig_1: J10.M4 Q10.2 | length 161
  Mid Top w0.762: Q10.2@37.587,122.428 37.587,120.401 38.608,119.38 79.375,119.38 82.804,122.809 132.842,122.809 136.271,119.38 158.623,119.38 170.104,107.899 J10.M4@170.104,91.542
  Bottom Layer w0.762: v3(105.299,124.794) 105.403,124.69 105.403,122.816 v2(105.41,122.809)
Ig_2: J10.M3 Q11.2 | length 166.1
  Mid Top w0.762: Q11.2@28.575,117.599 30.991,117.599 32.763,115.827 32.763,113.41 34.16,112.014 57.531,112.014 59.309,110.236 72.263,110.236 83.566,121.539 v2(103.251,121.539) 132.334,121.539 148.844,105.029 157.353,105.029 167.615,94.767 J10.M3@167.615,91.542
  Bottom Layer w0.762: v3(102.505,124.794) 102.489,124.778 102.489,122.311 103.251,121.549 v2(103.251,121.539)
Ig_3: J10.M2 Q12.2 | length 168.4
  Mid Top w0.762: Q12.2@28.575,105.408 31.752,105.408 36.195,100.965 65.024,100.965 84.328,120.269 131.826,120.269 148.336,103.759 151.892,103.759 161.671,93.98 163.068,93.98 J10.M2@165.354,91.694
  Bottom Layer w0.762: v3(99.711,124.794) 99.711,121.015 100.457,120.269 v2(105.537,120.269)
Ig_4: J10.M1 Q13.2 | length 166.8
  Mid Top w0.762: Q13.2@28.702,92.583 35.941,99.822 65.786,99.822 84.963,118.999 v2(103.378,118.999) 128.143,118.999 135.001,112.141 138.176,112.141 147.828,102.489 151.663,102.489 J10.M1@162.611,91.542
  Bottom Layer w0.762: v3(96.917,124.794) 96.917,121.904 99.822,118.999 v2(103.378,118.999)
Injector_1: LM1.1 U1.39 | length 59.2
  Top Layer w0.254: U1.39@123.511,57.92 126.091,57.92 126.619,57.392 v1(126.619,54.356)
  Mid Top w0.254: LM1.1@87.724,34.544 91.44,38.26 91.44,40.894 93.726,43.18 96.774,43.18 100.965,47.371 100.965,50.419 104.14,53.594 125.857,53.594 v1(126.619,54.356)
  Bottom Layer w0.254: v3(85.299,34.517) 87.697,34.517 LM1.1@87.724,34.544
Injector_2: LM2.1 U1.41 | length 60.4
  Top Layer w0.254: v1(121.956,56.92) U1.41@123.511,56.92
  Mid Top w0.254: v2(90.551,69.215) 90.551,64.135 93.853,60.833 104.902,60.833 105.029,60.833 105.143,60.947 105.143,61.481 105.258,61.595 110.5,61.595 110.614,61.481 110.614,60.947 110.5,60.833 106.02,60.833 105.905,60.719 105.905,60.185 106.02,60.071 111.262,60.071 111.376,60.185 111.376,60.719 111.49,60.833 111.617,60.833 118.043,60.833 v1(121.956,56.92)
  Mid Bottom w0.254: LM2.1@87.724,71.882 89.662,71.882 90.551,70.993 v2(90.551,69.215)
  Bottom Layer w0.254: v3(85.299,71.855) 87.697,71.855 LM2.1@87.724,71.882
Injector_3: LM3.1 U1.43 | length 59.3
  Top Layer w0.254: v1(121.892,55.92) U1.43@123.511,55.92
  Mid Top w0.254: LM3.1@87.691,59.436 92.964,59.436 94.234,58.166 104.648,58.166 104.775,58.166 104.889,58.28 104.889,58.814 105.004,58.928 114.071,58.928 114.186,58.814 114.186,58.28 114.071,58.166 105.766,58.166 105.651,58.052 105.651,57.518 105.766,57.404 114.833,57.404 114.948,57.518 114.948,58.052 115.062,58.166 115.189,58.166 119.646,58.166 v1(121.892,55.92)
  Bottom Layer w0.254: v3(85.299,59.536) 87.591,59.536 LM3.1@87.691,59.436
Injector_4: LM4.1 U1.44 | length 59.2
  Top Layer w0.254: v1(122.047,55.118) 122.35,55.42 U1.44@123.511,55.42
  Mid Top w0.254: LM4.1@87.597,46.99 89.535,48.928 89.535,51.054 94.107,55.626 104.648,55.626 104.775,55.626 104.889,55.74 104.889,56.274 105.004,56.388 112.166,56.388 112.281,56.274 112.281,55.74 112.166,55.626 105.766,55.626 105.651,55.512 105.651,54.978 105.766,54.864 112.928,54.864 113.043,54.978 113.043,55.512 113.157,55.626 113.284,55.626 121.285,55.626 121.746,55.165 122,55.165 v1(122.047,55.118)
  Bottom Layer w0.254: v3(85.299,46.963) 87.57,46.963 LM4.1@87.597,46.99
Injector_OUT_1: D25.C D27.C J10.A1 Q9.C | length 199.9
  Top Layer w2.032: Q9.C@28.194,43.815 32.893,43.815 35.023,41.685 D27.C@35.023,32.385 D25.C@38.637,32.385
  Mid Bottom w0.762: Q9.C@28.194,43.815 29.242,43.815 32.29,46.863 49.855,46.863 50.744,45.974 67.437,45.974 75.438,37.973 102.997,37.973 105.41,35.56 122.809,35.56 126.492,31.877 142.621,31.877 146.347,35.603 150.871,35.603 150.914,35.56 v2(153.924,35.56) 157.099,35.56 159.512,37.973 159.512,56.642 162.611,59.741 J10.A1@162.611,61.849
  Bottom Layer w0.762: v2(153.924,35.56) 156.337,35.56 162.413,29.484 v3(164.173,29.484)
Injector_OUT_2: D23.C D26.C J10.A4 Q8.C | length 214.1
  Top Layer w2.032: Q8.C@28.194,60.198 32.893,60.198 35.023,62.328 D23.C@35.023,71.755 D26.C@38.637,71.755
  Mid Top w0.762: v2(155.448,37.084) 169.037,37.084 170.561,38.608 v2(170.561,41.148)
  Mid Bottom w0.762: Q8.C@28.194,60.198 34.671,60.198 46.609,48.26 50.602,48.26 51.618,47.244 68.453,47.244 72.517,51.308 84.074,51.308 86.868,48.514 96.647,48.514 108.331,36.83 123.444,36.83 127.127,33.147 141.859,33.147 145.796,37.084 v2(155.448,37.084) ; J10.A4@170.104,61.849 170.104,61.567 170.561,61.11 v2(170.561,41.148)
  Bottom Layer w0.762: v2(155.448,37.084) 157.226,37.084 161.93,32.38 164.07,32.38 v3(164.173,32.278)
Injector_OUT_3: D19.C D21.C J10.A3 Q7.C | length 177.1
  Top Layer w2.032: Q7.C@58.547,60.35 63.398,60.35 65.249,62.201 D19.C@65.249,71.755 D21.C@68.887,71.755
  Mid Top w0.762: v2(153.924,38.481) 166.37,38.481 168.402,40.513 v2(168.402,42.926)
  Mid Bottom w0.762: Q7.C@58.547,60.35 59.595,60.35 67.367,52.578 84.582,52.578 87.249,49.911 97.155,49.911 108.966,38.1 124.079,38.1 127.762,34.417 141.097,34.417 145.161,38.481 v2(153.924,38.481) ; J10.A3@167.615,61.849 167.615,54.127 168.402,53.34 v2(168.402,42.926)
  Bottom Layer w0.762: v2(153.924,38.481) 158.115,38.481 161.524,35.072 v3(164.173,35.072)
Injector_OUT_4: D17.C D20.C J10.A2 Q6.C | length 169.3
  Top Layer w2.032: Q6.C@58.547,43.815 62.992,43.815 65.376,41.431 D20.C@65.376,32.385 D17.C@68.99,32.385
  Mid Bottom w0.762: Q6.C@58.547,43.815 66.802,43.815 74.041,36.576 102.235,36.576 104.521,34.29 122.174,34.29 125.857,30.607 143.261,30.607 146.944,34.29 157.861,34.29 161.544,37.973 161.544,52.197 165.1,55.753 J10.A2@165.1,61.849
  Bottom Layer w0.762: v2(155.41,34.292) 162.736,26.965 163.898,26.965 v3(164.173,26.69)
Input_Ig_1: R72.2 U1.59 U15.2 | length 161.9
  Top Layer w0.254: R72.2@36.576,107.652 R72.2@36.62,107.696 ; v1(129.159,53.594) 129.159,53.582 129.191,53.55 U1.59@129.191,50.74
  Top Layer w1.016: R72.2@36.62,107.696 U15.2@39.497,107.696
  Mid Bottom w0.254: U15.2@39.497,107.696 43.307,103.886 43.307,84.455 57.404,70.358 79.502,70.358 87.249,62.611 96.012,62.611 109.982,48.641 120.396,48.641 125.349,53.594 v1(129.159,53.594)
  Bottom Layer w0.254: v3(27.979,83.975) 34.925,90.921 34.925,103.124 U15.2@39.497,107.696
Input_Ig_2: R73.2 U1.60 U15.4 | length 155.7
  Top Layer w0.254: R73.2@36.576,102.572 R73.2@36.62,102.616 ; v1(129.667,53.086) 129.667,53.074 129.691,53.05 U1.60@129.691,50.74
  Top Layer w1.016: R73.2@36.62,102.616 U15.4@39.497,102.616
  Mid Bottom w0.254: U15.4@39.497,102.616 42.672,99.441 42.672,83.058 47.625,78.105 47.715,78.015 47.823,78.015 48.074,78.267 48.182,78.267 49.182,77.266 49.182,77.158 48.931,76.907 48.823,76.907 48.182,77.548 48.074,77.548 47.823,77.297 47.823,77.189 48.823,76.188 48.931,76.188 49.182,76.44 49.29,76.44 49.38,76.35 55.88,69.85 79.248,69.85 86.995,62.103 95.885,62.103 109.855,48.133 120.523,48.133 125.476,53.086 v1(129.667,53.086)
  Bottom Layer w0.254: v3(30.773,83.975) 30.773,86.145 35.56,90.932 35.56,98.679 U15.4@39.497,102.616
Input_Ig_3: R66.2 U1.61 U14.2 | length 148.3
  Top Layer w0.254: R66.2@36.576,95.333 R66.2@36.62,95.377 ; U14.2@39.243,95.377 39.497,95.631 U14.2@39.497,95.377 ; v1(130.175,52.578) 130.175,52.566 130.191,52.55 U1.61@130.191,50.74
  Top Layer w1.016: R66.2@36.933,95.356 37.203,95.356 37.224,95.377 39.243,95.377 U14.2@39.497,95.377
  Mid Bottom w0.254: U14.2@39.497,95.377 42.037,92.837 42.037,81.534 42.862,80.709 42.952,80.619 43.114,80.619 43.491,80.996 43.653,80.996 46.421,78.228 46.421,78.066 46.044,77.689 45.882,77.689 43.653,79.918 43.491,79.918 43.114,79.541 43.114,79.379 45.882,76.611 46.044,76.611 46.421,76.988 46.583,76.988 46.672,76.898 54.229,69.342 78.994,69.342 86.741,61.595 95.758,61.595 109.728,47.625 120.65,47.625 125.603,52.578 v1(130.175,52.578)
  Bottom Layer w0.254: v3(33.567,83.975) 33.567,88.304 36.195,90.932 36.195,93.726 37.846,95.377 U14.2@39.497,95.377
Input_Ig_4: R67.2 U1.62 U14.4 | length 141.2
  Top Layer w0.254: v1(130.683,52.07) 130.687,52.066 130.687,50.744 U1.62@130.691,50.74
  Top Layer w1.016: R67.2@36.576,90.253 36.62,90.297 U14.4@39.497,90.297
  Mid Bottom w0.254: U14.4@39.497,90.297 41.402,88.392 41.402,80.01 46.457,74.955 46.547,74.865 46.708,74.865 47.086,75.242 47.247,75.242 51.411,71.078 51.411,70.917 51.034,70.54 50.872,70.54 47.247,74.165 47.086,74.165 46.708,73.788 46.708,73.626 50.872,69.462 51.034,69.462 51.411,69.839 51.573,69.839 51.663,69.749 52.607,68.805 78.769,68.805 86.487,61.087 95.631,61.087 109.601,47.117 120.777,47.117 125.73,52.07 v1(130.683,52.07)
  Bottom Layer w0.254: v3(36.361,83.975) 36.361,84.367 39.497,87.503 U14.4@39.497,90.297
JTDI: J9.06 U1.77 | length 9.9
  Top Layer w0.254: U1.77@138.871,52.92 140.247,52.92 141.097,52.07 J9.06@148.466,52.07
LAMBDA_H+: J10.J4 NT1.1 | length 3.9
  Top Layer w0.762: J10.J4@170.104,81.839 J10.J4@170.118,81.853
  Top Layer w1.016: J10.J4@170.118,81.853 171.896,81.853 NT1.1@173.355,83.312
MAP_OUT: C23.2 J10.K3 MAP1.4 R9.1 U1.16 | length 130.1
  Top Layer w0.254: v1(129.286,64.643) 129.691,65.048 U1.16@129.691,66.1 ; v1(149.987,110.49) R9.1@151.467,110.49
  Top Layer w0.508: C23.2@154.051,113.792 150.514,113.792 MAP1.4@150.495,113.811 150.495,112.395 151.303,111.587 151.303,110.654 151.647,110.998 151.647,111.05 151.698,111.101 155.17,111.101 155.829,111.76 173.355,111.76 v2(176.149,108.966)
  Mid Top w0.254: v1(125.349,82.042) 125.349,86.741 140.208,101.6 v1(146.558,101.6)
  Mid Bottom w0.254: v1(125.349,82.042) 125.349,69.85 127.381,67.818 128.016,67.818 129.286,66.548 v1(129.286,64.643) ; v1(146.558,101.6) 149.987,105.029 v1(149.987,110.49)
  Mid Bottom w0.508: J10.K3@167.615,84.353 169.367,86.106 175.387,86.106 176.149,86.868 v2(176.149,108.966)
MCU_HEATER_OUT: R7.1 U1.30 | length 34.3
  Top Layer w0.254: R7.1@116.161,81.153 116.967,81.153 117.983,80.137 117.983,74.93 116.967,73.914 113.538,73.914 112.649,73.025 112.649,63.627 113.856,62.42 U1.30@123.511,62.42
MCU_Ralay_1_OUT: D13.C R44.1 | length 2.7
  Top Layer w1.016: R44.1@138.589,86.531 140.817,86.531 140.994,86.708 D13.C@141.224,86.708
MCU_Ralay_2_OUT: D15.C R49.1 | length 2.7
  Top Layer w0.508: D15.C@127.667,76.421 D15.C@127.756,76.332 ; R49.1@130.246,76.332 R49.1@130.334,76.244
  Top Layer w1.016: D15.C@127.756,76.332 R49.1@130.246,76.332
NetC13_2: C13.2 R1.2 U2.22 | length 6.9
  Top Layer w0.254: R1.2@104.14,74.72 R1.2@104.311,74.549 ; U2.22@104.14,78.359 v1(104.14,80.01)
  Top Layer w0.762: R1.2@104.14,74.72 U2.22@104.14,78.359
  Bottom Layer w0.254: v1(104.14,80.01) 104.14,81.394 C13.2@104.153,81.407